# Altium PCB Slave_Power.PcbDoc
Units mil, origin at the board's own origin, x right, y up, seen from the top; angles counter-clockwise.
Board outline 6000 x 4000 mil, 2 copper layers (Top Layer, Bottom Layer); 28 components, 44 nets, 167 pads, 16 vias.
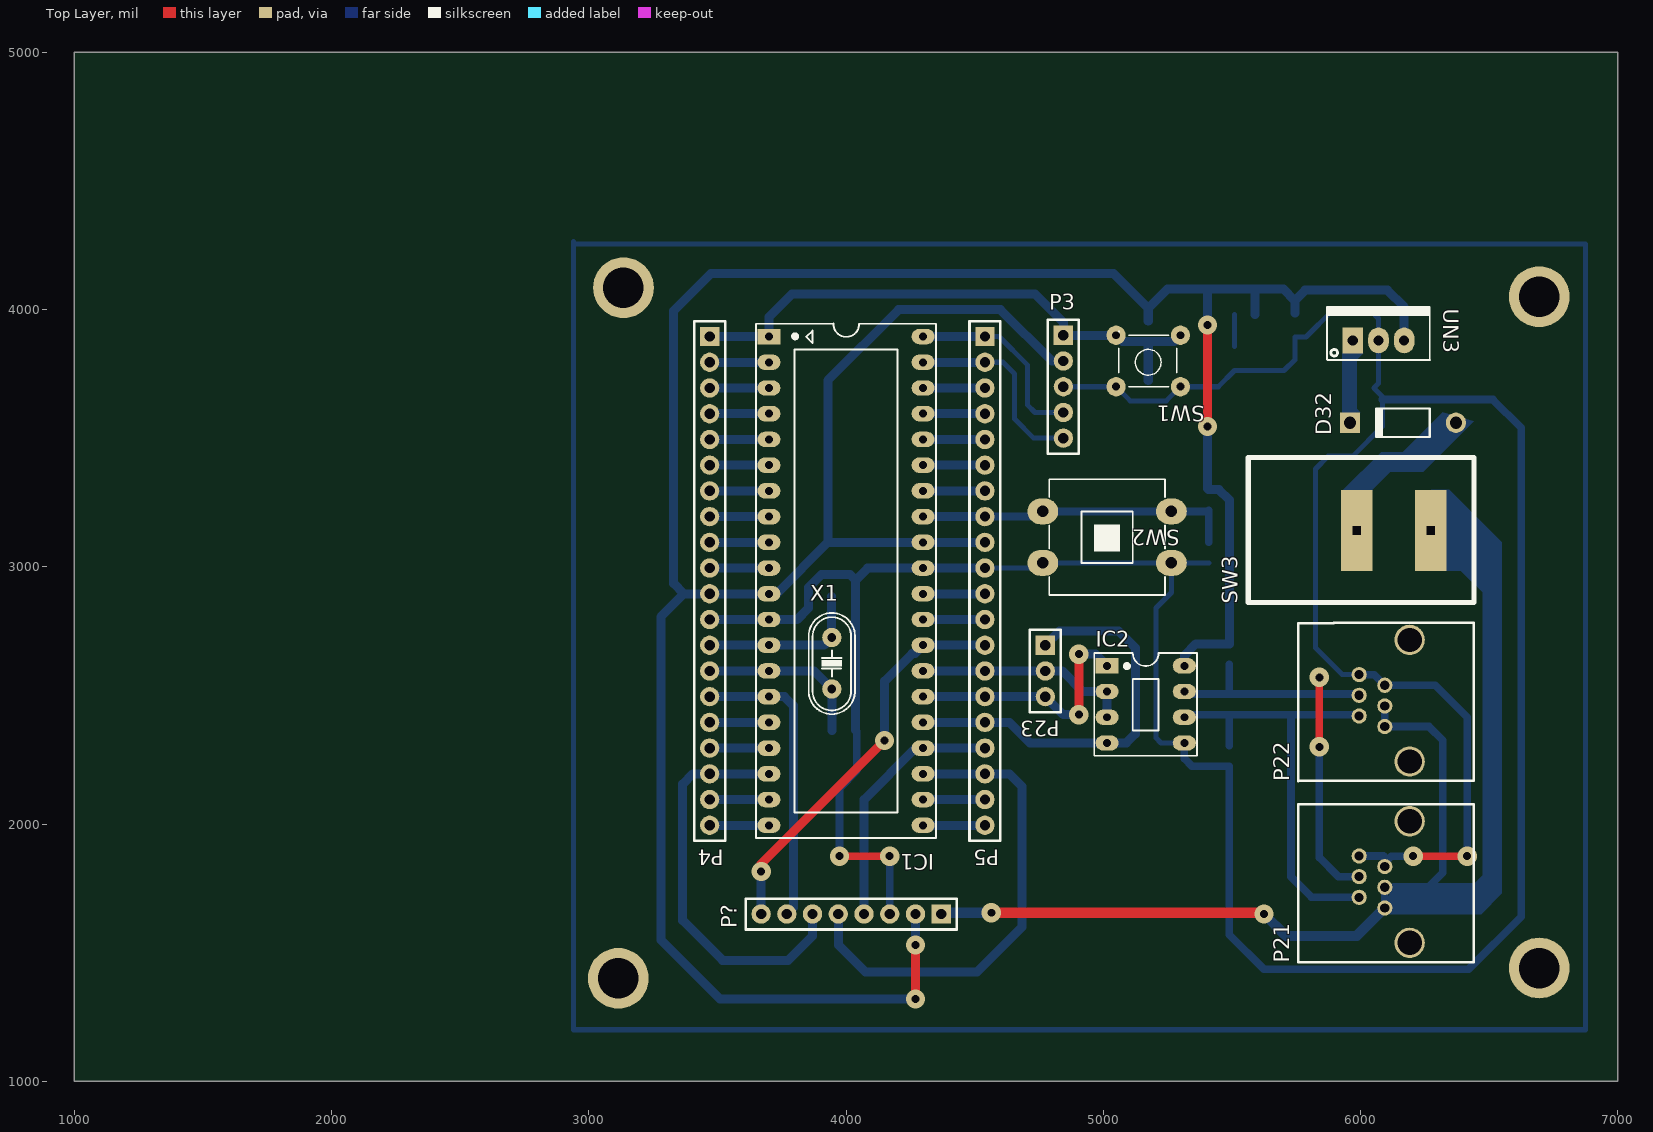
[diagram p0: Top Layer view]
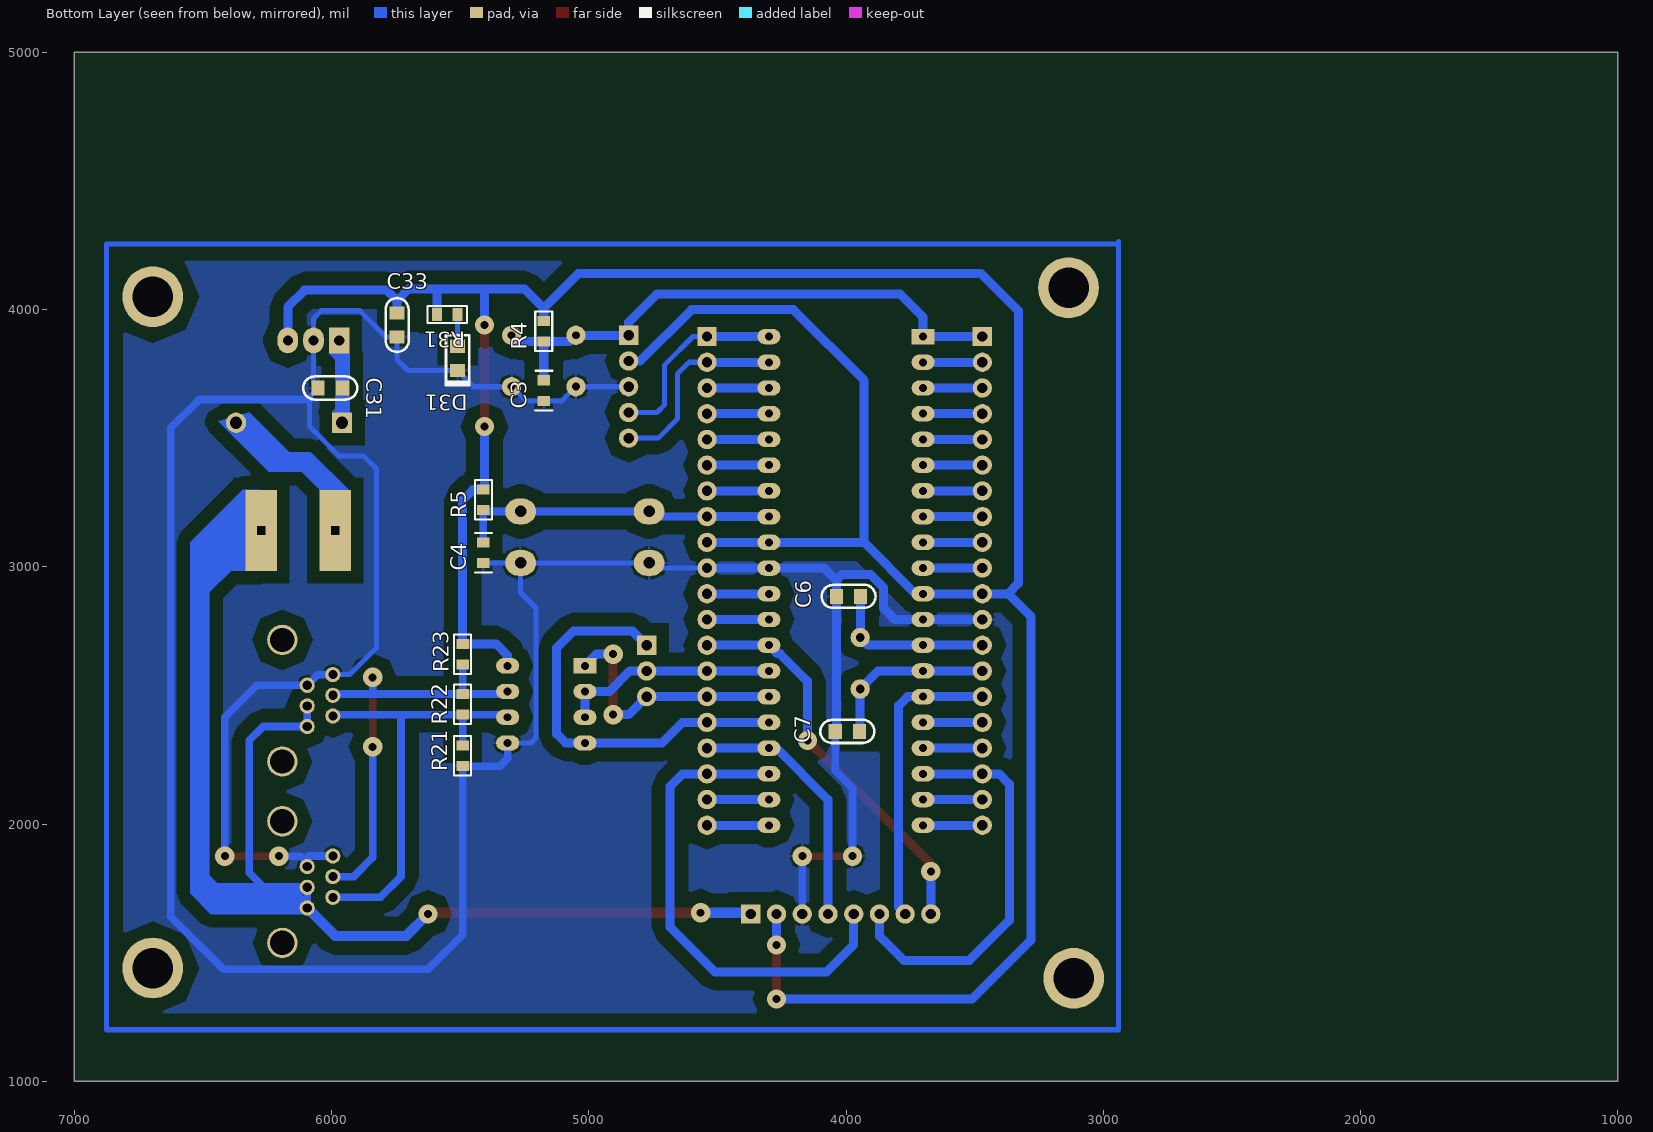
[diagram p1: Bottom Layer view, seen from below]
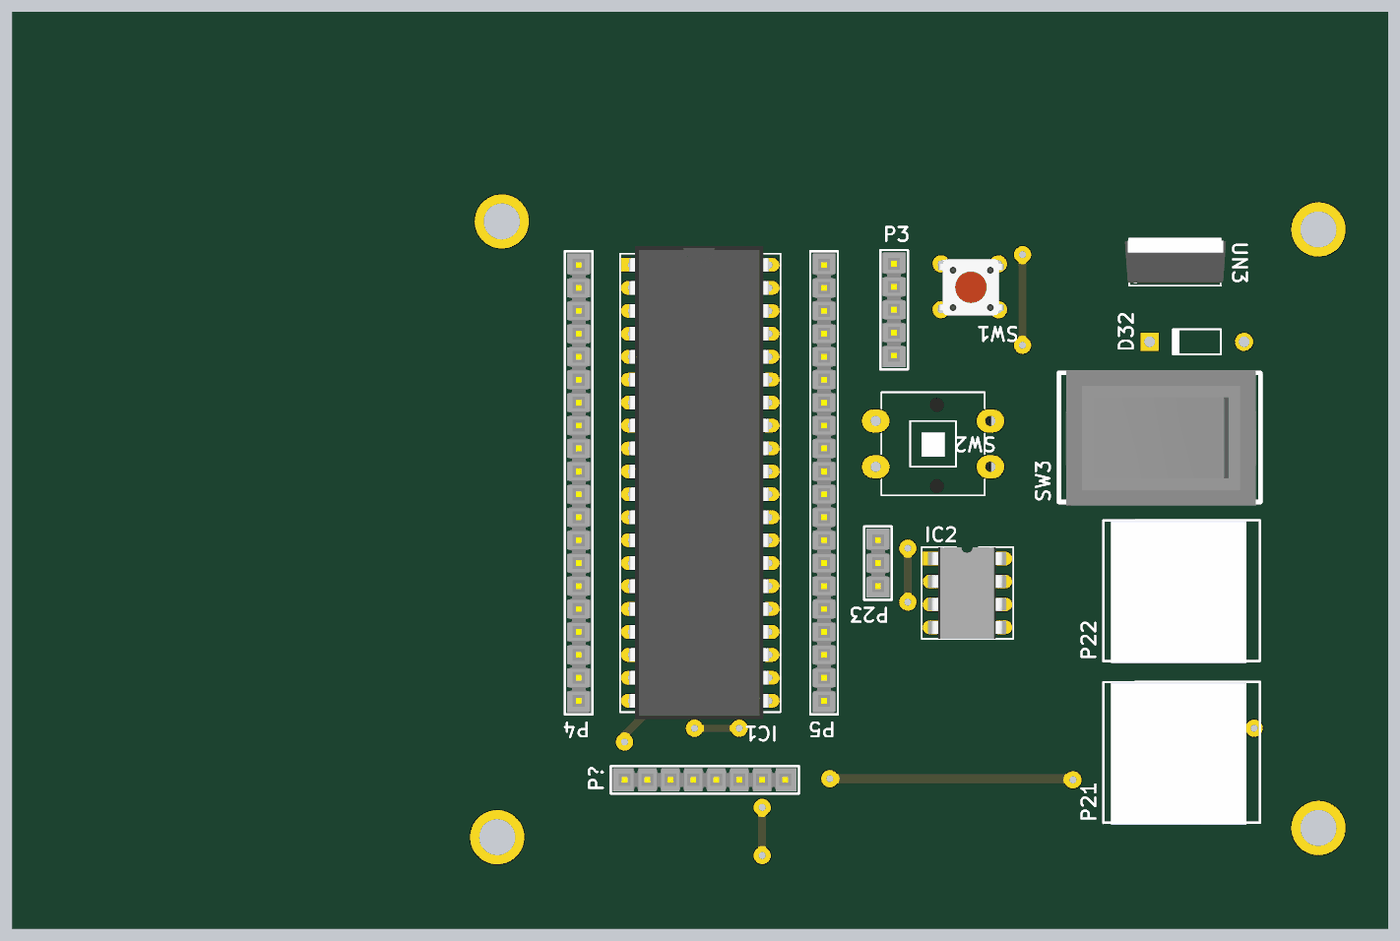
[diagram p2: 3D render of the assembled board from above, using the file's embedded part models]
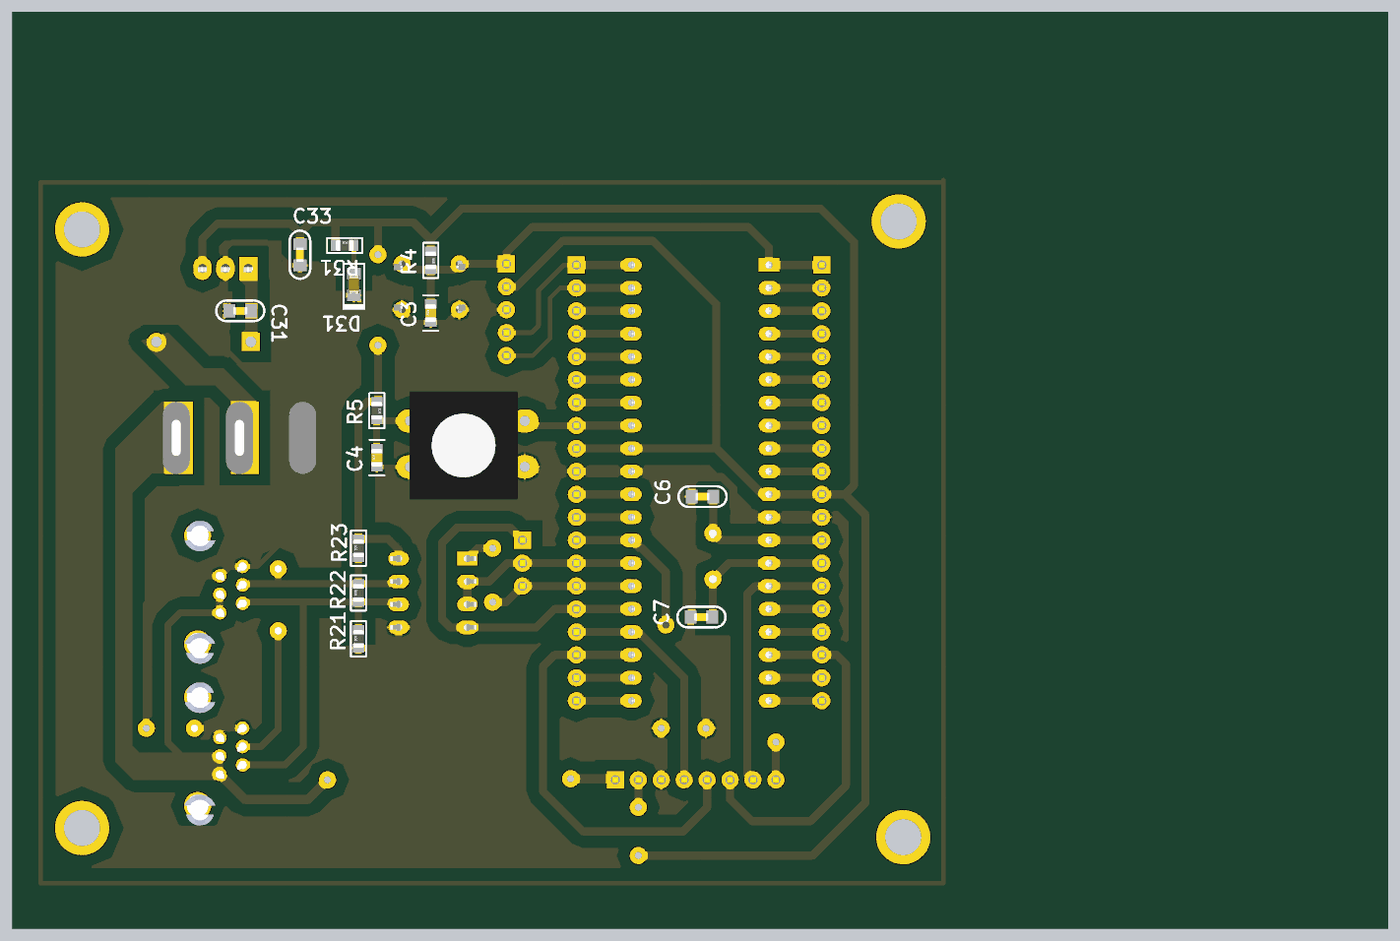
[diagram p3: 3D render of the assembled board from below, using the file's embedded part models]

## Layer stack, top to bottom
Top Solder: solder mask 0.4, Solder Resist, Dk 3.5
Top Layer: signal copper 1.4
Dielectric 1: dielectric 12.6, FR-4, Dk 4.8
Bottom Layer: signal copper 1.4
Bottom Solder: solder mask 0.4, Solder Resist, Dk 3.5

## Board outline
1000,1000 7000,1000 7000,5000 1000,5000

## Design rules (kind name [scope] priority, off if disabled: settings)
Clearance [All] p1: gap=50
PolygonConnect [All] p1: connectstyle=Relief reliefconductorwidth=10 reliefentries=4 polygonreliefangle="90 Angle" airgapwidth=10
RoutingVias [All] p1: holewidth=28 width=50 viastyle="Through Hole" minholewidth=28 minwidth=50 maxholewidth=28 maxwidth=50
SolderMaskExpansion [All] p1: expansion=4
Width [All] p1: maxlimit=50 minlimit=15 preferedwidth=25
30 further rules are at their usual default settings.

## Components (designator, comment, footprint, x,y, rotation, side; value= is the part's Value field where it differs from the comment)
C3 "Capacitor Ceramic" CAP_SMD_0805 5175,3685 r90 bottom
C4 "Capacitor Ceramic" CAP_SMD_0805 5410,3055 r90 bottom
C6 "Cap Non-pol" C-NP-0805 3990,2885 r0 bottom
C7 "Cap Non-pol" C-NP-0805 3995,2360 r0 bottom
C31 "Cap Non-pol" C-NP-0805 6005,3695 r180 bottom
C33 "Cap Non-pol" C-NP-0805 5745,3940 r90 bottom
D31 "LED" "LED-0805 RED" 5510,3810 r270 bottom
D32 "Diode 1N4007" DO-41 6165,3560 r180 top
IC1 "PIC16F887" DIP40/W0.6 3700,3895 r270 top
IC2 "MAX485" DIP8/W0.3 5015,2615 r270 top
P3 "Header 5" "Header 5" 4845,3900 r270 top
P4 "Header 20" "Header 20" 3470,3895 r270 top
P5 "Header 20" "Header 20" 4540,3895 r270 top
P21 "Header 8" RJ11 5995,1715 r90 top
P22 "Header 8" RJ11 5995,2420 r90 top
P23 "Header 3" "Header 3" 4775,2695 r270 top
P? "Header 8" "Header 8" 4370,1650 r180 top
R4 "RES_SMD_0805" "DIEN TRO 0805" 5175,3915 r90 bottom
R5 "RES_SMD_0805" "DIEN TRO 0805" 5410,3260 r90 bottom
R21 "RES_SMD_0805" "DIEN TRO 0805" 5490,2265 r270 bottom
R22 "RES_SMD_0805" "DIEN TRO 0805" 5490,2465 r270 bottom
R23 "RES_SMD_0805" "DIEN TRO 0805" 5490,2660 r270 bottom
R31 "RES_SMD_0805" "DIEN TRO 0805" 5550,3980 r0 bottom
SW1 "SW" SW4 5300,3700 r180 top
SW2 "SW" SW4B 5265,3215 r180 top
SW3 "SW_BapBenh" SW_Bapbenh 6245,3145 r90 top
UN3 "L78M05CP" QTO-220 5970,3880 r0 top
X1 "20Mhz" XT2 3945,2625 r90 top

## Footprints (in the part's own frame and the unit in brackets; to place one, negate y for a bottom-side part, rotate by r counter-clockwise, add the part's x,y. Pads: shape width x height; smd on the part's side, far side on the other; paste and mask are expansions set on the pad)
C-NP-0805 [mm] "Chip Capacitor; Non-polarized; Body 2.0 x 1.3 mm (LxW typ) [2012]"
  rect 1.3x1.5 smd: 1(-1.194,0) 2(1.194,0)
  silkscreen extent -2.67,-1.14 2.66,1.14, body extent -0.8,-0.43 0.8,0.43, height 0.79
CAP_SMD_0805 [mil] "Chip Resistor; Body 2.0 x 1.3 mm (LxW typ)"
  rect 39.37x50 smd: 1(-40,0) 2(40,0)
  silkscreen extent -77,-33 77,33, body extent -39,-25 39,25, height 31
"DIEN TRO 0805" [mil] "Chip Resistor; Body 2.0 x 1.3 mm (LxW typ)"
  rect 39.37x50 smd: 1(-40,0) 2(40,0)
  silkscreen extent -77,-33 77,33, body extent -39,-25 39,25, height 31
DIP8/W0.3 [mil] "8 PIN, W 300mil, Pin to pin 100mil"
  rect 60x90 hole 31: 1(0,0)
  oval 60x90 hole 31: 2(100,0) 3(200,0) 4(300,0) 5(300,300) 6(200,300) 7(100,300) 8(0,300)
  silkscreen extent -50,-50 350,350, body extent -50,-40 350,336, height 201
DIP40/W0.6 [mil] "40 PIN, W 600mil, Pin to pin 100mil"
  rect 60x90 hole 31: 1(0,0)
  oval 60x90 hole 31: 2(100,0) 3(200,0) 4(300,0) 5(400,0) 6(500,0) 7(600,0) 8(700,0) 9(800,0) 10(900,0) 11(1000,0) 12(1100,0) 13(1200,0) 14(1300,0) 15(1400,0) 16(1500,0) 17(1600,0) 18(1700,0) 19(1800,0) 20(1900,0) 21(1900,600) 22(1800,600) 23(1700,600) 24(1600,600) 25(1500,600) 26(1400,600) 27(1300,600) 28(1200,600) 29(1100,600) 30(1000,600) 31(900,600) 32(800,600) 33(700,600) 34(600,600) 35(500,600) 36(400,600) 37(300,600) 38(200,600) 39(100,600) 40(0,600)
  silkscreen extent -50,-50 1950,650, body extent -82,-10 1982,600, height 224
DO-41 [mm] "Diode, Axial; Body 5.2 x 2.7 mm (LxDia. max), Lead Dia. 0.86 mm (max)"
  round 2 hole 1.2: 1(-5.23,0)
  rect 2x2 hole 1.2: 2(5.23,0)
  silkscreen extent -2.65,-1.4 2.75,1.4
"Header 3" [mil] "Connector; Header; 3 Position; Solder Pad 35mil"
  rect 75x75 hole 40: 1(0,0)
  round 75 hole 40: 2(100,0) 3(200,0)
  silkscreen extent -60,-60 260,60, body extent -50,-50 250,50, height 83
"Header 5" [mil] "Connector; Header; 5 Position; Solder Pad 35mil"
  rect 75x75 hole 40: 1(0,0)
  round 75 hole 40: 2(100,0) 3(200,0) 4(300,0) 5(400,0)
  silkscreen extent -60,-60 460,60, body extent -50,-50 450,50, height 83
"Header 8" [mil] "Connector; Header; 8 Position; Solder Pad 35mil"
  rect 75x75 hole 40: 1(0,0)
  round 75 hole 40: 2(100,0) 3(200,0) 4(300,0) 5(400,0) 6(500,0) 7(600,0) 8(700,0)
  silkscreen extent -60,-60 760,60, body extent -50,-50 750,50, height 330
"Header 20" [mil] "Connector; Header; 20 Position; Solder Pad 35mil"
  rect 75x75 hole 40: 1(0,0)
  round 75 hole 40: 2(100,0) 3(200,0) 4(300,0) 5(400,0) 6(500,0) 7(600,0) 8(700,0) 9(800,0) 10(900,0) 11(1000,0) 12(1100,0) 13(1200,0) 14(1300,0) 15(1400,0) 16(1500,0) 17(1600,0) 18(1700,0) 19(1800,0) 20(1900,0)
  silkscreen extent -60,-60 1960,60, body extent -50,-50 1950,50, height 330
"LED-0805 RED" [mm] "Chip LED; RED; Body 2.0 x 1.3 mm (LxW typ) [2012]"
  rect 1.3x1.5 smd: 1(-1.204,0) 2(1.204,0)
  silkscreen extent -2.29,-1.14 2.67,1.14, body extent -1.01,-0.63 1.01,0.62, height 1.1
QTO-220 [mil] "TO-220 - 1-2-3"
  rect 80x100 hole 39: 1(0,0)
  oval 80x100 hole 39: 2(100,0) 3(200,0)
  silkscreen extent -100,-76 300,130, body extent -119,-64 322,121, height 755
RJ11 [mm] "DIP 20, 20 PIN, W 300mil, Pin to pin 100mil"
  round 1.5 hole 0.9: 1(0,0) 2(2.04,0) 3(4.08,0) 4(-1.05,-2.53) 5(0.99,-2.53) 6(3.03,-2.53)
  round 3 hole 2.4: 7(-4.5,-4.98) 8(7.51,-4.98)
  silkscreen extent -6.43,-11.3 9.2,6.03, body extent -6.71,-9.8 9.11,5.19, height 12.87
SW4 [mil] "SW button 4pin, 250 x250 mil"
  round 75 hole 31: 1(0,0) 2(250,-200) 3(250,0) 4(0,-200)
  silkscreen extent 15,-215 240,0, body extent -36,-220 276,24, height 276
SW4B [mil] "SW button 4pin, 450 x 450 mil"
  oval 120x100 hole 45: 1(0,200) 2(500,0) 3(500,200) 4(0,0)
  silkscreen extent 25,-125 475,325, body extent -3,-129 469,343, height 169
SW_Bapbenh [mm] "Typical LED; GREEN; RED; 2 Leads; Solder Pad 35mil"
  rect 8x3.1 hole 0.8 square: 1(-0.1,-0.7) 2(-0.1,6.6)
  silkscreen extent -7.2,-5 7.1,17.3, body extent -7.6,-4.55 7.4,16.55, height 16.72
XT2 [mil] "Footpin for Crystal 2 pin"
  round 75 hole 34: 1(-100,0) 2(100,0)
  silkscreen extent -198,-90 195,90, body extent -233,-93 213,90, height 138

## Part data
C3 C4: library part CapSMD, "Capacitor"
C6 C7 C31 C33: "Non-polarized Capacitor"
D31: "Typical LED"
D32: "1 Amp General Purpose Rectifier"
IC2: "RS232 - RS485 (Same sn75176)"
P3: "Header, 5-Pin"
P4 P5: "Header, 20-Pin"
P21 P22 P?: "Header, 8-Pin"
P23: "Header, 3-Pin"
R4 R5 R21 R22 R23 R31: "RES_0805"
SW1 SW2: library part SW4, "Switch button 4 pin"
UN3: "Positive Voltage Regulator"
X1: library part XT2, "Crystal For all Crystal 2pin."

## Free pads (board coordinates)
  round 236.22 hole 157.48: 2(3115,1400) 2(3135,4085) 2(6695,1440) 2(6695,4050)

## Via types
v1: diameter 75, hole 31, Top Layer to Bottom Layer, 16 vias

## Nets (pads, with @x,y where several pads share a name; then routed paths per layer and width w, separated by ;. In a path a pad name is that pad's centre, name@x,y a point inside that pad or via, vN(x,y) a via of type N, cw(c..) or ccw(c..) an arc to the next point about the centre after c; other vN are vias at no path point)
12V: P21.4 P21.5 P22.4 P22.5 P?.1 SW3.1 | length 4887.2
  Top Layer w40: v1(4565,1655) 5620,1655 v1(5625,1650)
  Bottom Layer w30: P22.5 P22.4 6266.34,2378.66 6320,2325 6320,1810 6263.98,1753.98 P21.5 P21.4 6403.66,1673.66 6495,1765 6495,2918.62 SW3.1
  Bottom Layer w40: P?.1 4375,1655 v1(4565,1655) ; v1(5625,1650) 5710,1565 5985.94,1565 P21.4
A: IC2.6 P21.1 P22.1 R21.1 R22.2 | length 1734.4
  Bottom Layer w30: IC2.6 5325,2425 R22.2 ; R21.1 R22.2 ; P21.1 5810,1715 5730,1795 5730,2425 ; P22.1 5990,2425 5730,2425 ; R22.2 5730,2425
B: IC2.7 P21.2 P22.2 R22.1 R23.2 | length 1754.1
  Top Layer w30: v1(5840,2300) v1(5840,2570)
  Bottom Layer w30: IC2.7 5325,2505 R22.1 ; R23.2 R22.1 ; v1(5840,2300) 5840,1870 5914.69,1795.32 P21.2 ; v1(5840,2570) 5840,2510 5835,2505 ; P22.2 5990.31,2505 5835,2505 ; R22.1 5835,2505
BUTTON1: C4.2 IC1.33 P5.8 R5.1 SW2.2 SW2.4 | length 1245.4
  Bottom Layer w30: P5.8 4745,3195 SW2.2 SW2.4 5405,3215 R5.1 C4.2
  Bottom Layer w35: IC1.33 P5.8
CS: IC1.15 P4.15 P?.7 | length 1159.9
  Bottom Layer w35: P4.15 IC1.15 3760,2495 3795,2460 3795,1675 P?.7
DIN: IC1.23 P5.18 P?.5 | length 1901.7
  Bottom Layer w35: P?.5 3970,1530 4075,1425 4510,1425 4685,1600 4685,2145 4635,2195 P5.18 IC1.23
DOUT: IC1.24 P5.17 P?.4 | length 997.8
  Bottom Layer w35: P?.4 4070,2095 4270,2295 IC1.24 P5.17
GND: C3.1 C4.1 C6.2 C7.2 C31.1 C33.1 D31.2 IC1.12 IC1.31 IC2.5 P3.3 P4.12 P5.10 P21.3 P21.6 P22.3 P22.6 P?.3 R21.2 SW1.1 SW1.3 SW2.1 SW2.3 UN3.2 | length 13747
  Top Layer w30: v1(3975,1875) v1(4170,1875) ; v1(6205,1875) v1(6415,1875) v1@6414.37,1875.63
  Bottom Layer w20: P5.10 4745,2995 SW2.3 SW2.1 ; P3.3 SW1.3 5105,3645 C3.1 5245,3645 SW1.1 5447.4,3700 D31.2 5702.6,3762.6 5745,3805 C33.1 5788,3893 5890,3995 6040,3995 6070,3965 UN3.2 6070,3713 C31.1 6085,3662 6085,3650 6085,3545 5970,3430 5875,3430 5825,3380 5825,2685 5929.37,2580.63 P22.3 ; IC2.5 5225,2315 5205,2335 5205,2840 5265,2900 SW2.1 ; C4.1 SW2.1
  Bottom Layer w30: v1(3975,1875) 3975,2140 4042,2207 C7.2 ; P?.3 v1(4170,1875) ; IC2.5 5315,2255 5345,2225 R21.2 5490,1570 5625,1435 6420,1435 6625,1640 6625,3540 6515,3650 6085,3650 ; P21.3 6089.37,1875.63 6094.61,1870.39 P21.6 6094.61,1849.61 6120,1875 v1(6205,1875) ; P22.3 6053.27,2580.63 P22.6 6290.71,2539.29 6415,2415 v1(6415,1875)
  Bottom Layer w35: P4.12 IC1.12 3810,2795 3855,2840 3855,2920 3905,2970 4015,2970 4037,2948 ; C7.2@4037,2365 C6.2 4037,2948 ; P5.10 IC1.31 4084,2995 4037,2948
MCLR: C3.2 IC1.1 P3.1 P4.1 R4.1 SW1.2 SW1.4 | length 2208.6
  Bottom Layer w35: P4.1 IC1.1 3700,3970 3790,4060 4735,4060 4845,3950 P3.1 SW1.2 5075,3875 R4.1 ; C3.2 R4.1 ; SW1.4 5275,3875 R4.1
NetC31_2: C31.2 D32.2 UN3.1 | length 325.4
  Bottom Layer w35: D32.2 5958,3561.09 C31.2 5958,3868 UN3.1
NetD31_1: D31.1 R31.1 | length 122.6
  Bottom Layer w20: D31.1 R31.1
NetD32_1: D32.1 SW3.2 | length 640.8
  Bottom Layer w35: SW3.2 5985.16,3280.16 6105,3400 6210.91,3400 D32.1
NetIC1_2: IC1.2 P4.2 | length 230
  Bottom Layer w35: P4.2 IC1.2
NetIC1_3: IC1.3 P4.3 | length 230
  Bottom Layer w35: P4.3 IC1.3
NetIC1_4: IC1.4 P4.4 | length 230
  Bottom Layer w35: P4.4 IC1.4
NetIC1_5: IC1.5 P4.5 | length 230
  Bottom Layer w35: P4.5 IC1.5
NetIC1_6: IC1.6 P4.6 | length 230
  Bottom Layer w35: P4.6 IC1.6
NetIC1_7: IC1.7 P4.7 | length 230
  Bottom Layer w35: P4.7 IC1.7
NetIC1_8: IC1.8 P4.8 | length 230
  Bottom Layer w35: P4.8 IC1.8
NetIC1_9: IC1.9 P4.9 | length 230
  Bottom Layer w35: P4.9 IC1.9
NetIC1_10: IC1.10 P4.10 | length 230
  Bottom Layer w35: P4.10 IC1.10
NetIC1_16: IC1.16 P4.16 | length 230
  Bottom Layer w35: P4.16 IC1.16
NetIC1_17: IC1.17 P4.17 | length 230
  Bottom Layer w35: P4.17 IC1.17
NetIC1_19: IC1.19 P4.19 | length 230
  Bottom Layer w35: P4.19 IC1.19
NetIC1_20: IC1.20 P4.20 | length 230
  Bottom Layer w35: P4.20 IC1.20
NetIC1_21: IC1.21 P5.20 | length 240
  Bottom Layer w35: IC1.21 P5.20
NetIC1_22: IC1.22 P5.19 | length 240
  Bottom Layer w35: IC1.22 P5.19
NetIC1_29: IC1.29 P5.12 | length 240
  Bottom Layer w35: IC1.29 P5.12
NetIC1_30: IC1.30 P5.11 | length 240
  Bottom Layer w35: IC1.30 P5.11
NetIC1_34: IC1.34 P5.7 | length 240
  Bottom Layer w35: IC1.34 P5.7
NetIC1_35: IC1.35 P5.6 | length 240
  Bottom Layer w35: IC1.35 P5.6
NetIC1_36: IC1.36 P5.5 | length 240
  Bottom Layer w35: IC1.36 P5.5
NetIC1_37: IC1.37 P5.4 | length 240
  Bottom Layer w35: IC1.37 P5.4
NetIC1_38: IC1.38 P5.3 | length 240
  Bottom Layer w35: IC1.38 P5.3
PGC: IC1.39 P3.5 P5.2 | length 769.7
  Bottom Layer w20: P5.2 4610,3795 4655,3750 4655,3575 4730,3500 P3.5
  Bottom Layer w35: IC1.39 P5.2
PGD: IC1.40 P3.4 P5.1 | length 758
  Bottom Layer w20: P5.1 4595,3895 4705,3785 4705,3630 4735,3600 P3.4
  Bottom Layer w35: IC1.40 P5.1
RELAY: IC1.28 P5.13 P?.8 | length 1552.1
  Top Layer w35: v1(3670,1815) 3670,1845 v1(4150,2325)
  Bottom Layer w35: P?.8 v1(3670,1815) ; v1(4150,2325) 4150,2555.46 4257.04,2662.5 4267.5,2662.5 IC1.28 P5.13
RXD: IC1.26 IC2.1 P5.15 P23.3 | length 997.6
  Top Layer w35: v1(4905,2425) v1(4905,2660)
  Bottom Layer w35: IC1.26 P5.15 P23.3 4845,2425 v1(4905,2425) ; v1(4905,2660) 4970,2660 IC2.1
SCLK: IC1.18 P4.18 P?.6 | length 1575.1
  Bottom Layer w35: IC1.18 P4.18 3405,2195 3365,2155 3365,1625 3520,1470 3775,1470 3870,1565 P?.6
SEC: IC1.27 IC2.2 IC2.3 P5.14 P23.2 | length 848.1
  Bottom Layer w35: IC1.27 P5.14 P23.2 4840,2595 4920,2515 IC2.2 IC2.3
TXD: IC1.25 IC2.4 P5.16 P23.1 | length 1607.3
  Bottom Layer w35: IC1.25 P5.16 4635,2395 4715,2315 IC2.4 5090,2315 5125,2350 5125,2685 5060,2750 4830,2750 P23.1
VCC: C33.2 IC1.11 IC1.32 IC2.8 P3.2 P4.11 P5.9 P?.2 R4.2 R5.2 R23.1 R31.2 UN3.3 | length 11951.1
  Top Layer w35: v1(4270,1320) v1(4270,1530) ; v1(5405,3545) v1(5405,3940)
  Bottom Layer w35: v1(4270,1320) 3510,1320 3280,1550 3280,2805 3370,2895 ; v1(4270,1530) P?.2 ; P5.9 IC1.32 3930,3095 ; P3.2 4800,3800 4600,4000 4205,4000 3930,3725 3930,3095 ; R4.2 5175,4005 ; IC2.8 5315,2655 5360,2700 R23.1 5490,3260 5450,3300 R5.2 ; R5.2@5405,3305 v1(5405,3545) ; v1(5405,3940) 5405,4080 ; R31.2 5590,4080 ; C33.2 5745,4035 ; UN3.3 6170,4010 6105,4075 5785,4075 5745,4035 ; 3370,2895 P4.11 IC1.11 3730,2895 3930,3095 ; 3370,2895 3330,2935 3330,3995 3475,4140 5040,4140 5175,4005 ; 5175,4005 5250,4080 5405,4080 ; 5405,4080 5590,4080 ; 5590,4080 5700,4080 5745,4035
XT1: C6.1 IC1.13 P4.13 X1.2 | length 645.4
  Bottom Layer w35: P4.13 IC1.13 3915,2695 X1.2 ; X1.2@3943,2727 C6.1
XT2: C7.1 IC1.14 P4.14 X1.1 | length 666
  Bottom Layer w35: P4.14 IC1.14 3875,2595 X1.1 C7.1@3945,2363
pads on no net: P21.7 P21.8 P22.7 P22.8
copper on no net: | length 14000
  Bottom Layer w20: 2940,1200 2940,4265 2940,4255 2995,4255 6875,4255 6875,4175 6875,4125 6875,1200 6845,1200 2940,1200

## Polygon pours and split planes (outlines as drawn)
GND on Bottom Layer "G2" (solid, remove dead copper, pour order 0): 2970,4200 6850,4200 6850,1255 6840,1245 6830,1235 2965,1235

## Other copper
Bottom Layer:
  region net NetD32_1: 6045,3295 6045,3300 6115,3370 6245,3370 6440.16,3565.16 6320.16,3600.16 6270,3550 6165,3445 6080,3445 5930,3295
  region net 12V: 6125,1770 6445,1770 6475,1800 6475,2900 6390,2985 6275,2985 6275,3300 6345,3300 6550,3095 6550,1730 6470,1650 6090,1650
  region net NetC31_2: 5920,3590 5930,3600 5930,3830 6010,3830 5985,3805 5985,3615 6000,3600